# Altium PCB PCB_Oxi_VT0.1-991023.PcbDoc
Units mm, origin at the board's own origin, x right, y up, seen from the top; angles counter-clockwise.
Board outline 53 x 27 mm, 2 copper layers (Top Layer, Bottom Layer); 76 components, 66 nets, 324 pads, 0 vias.
Unrouted connection lines stored in the file: 150.
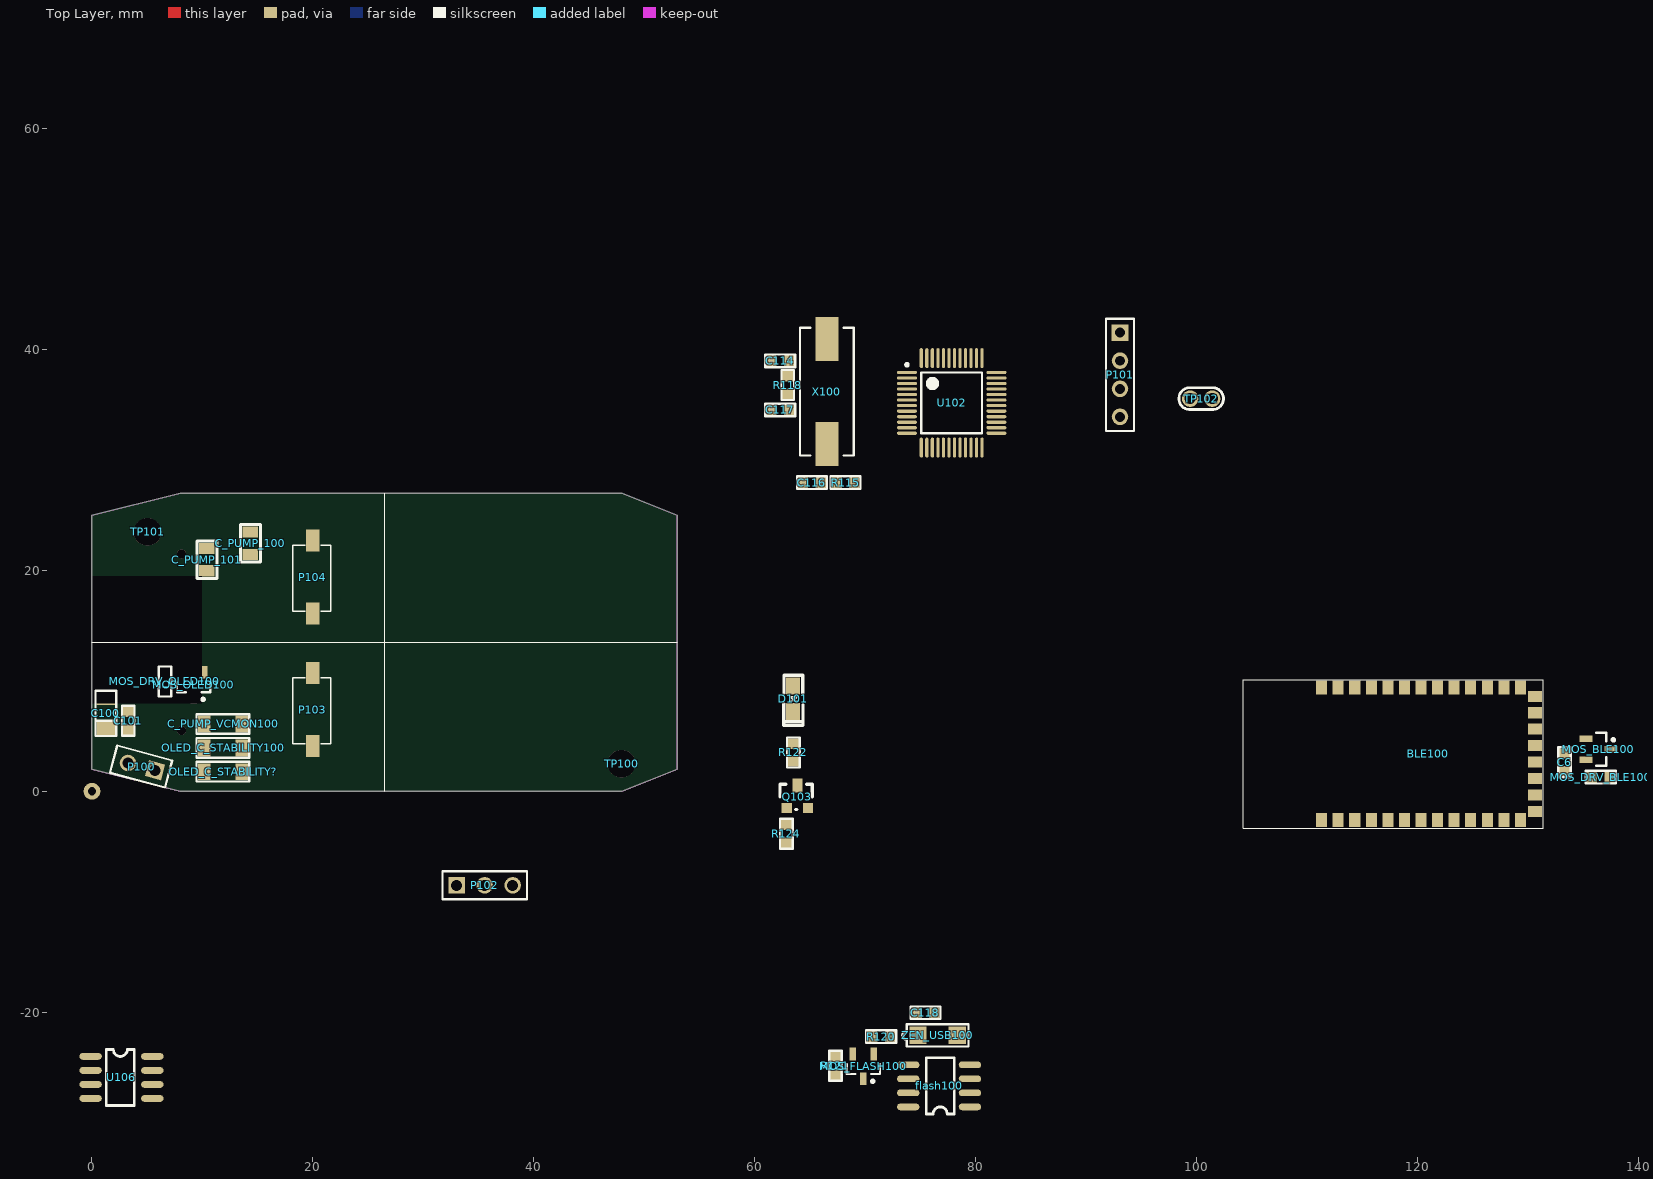
[diagram p0: Top Layer view]
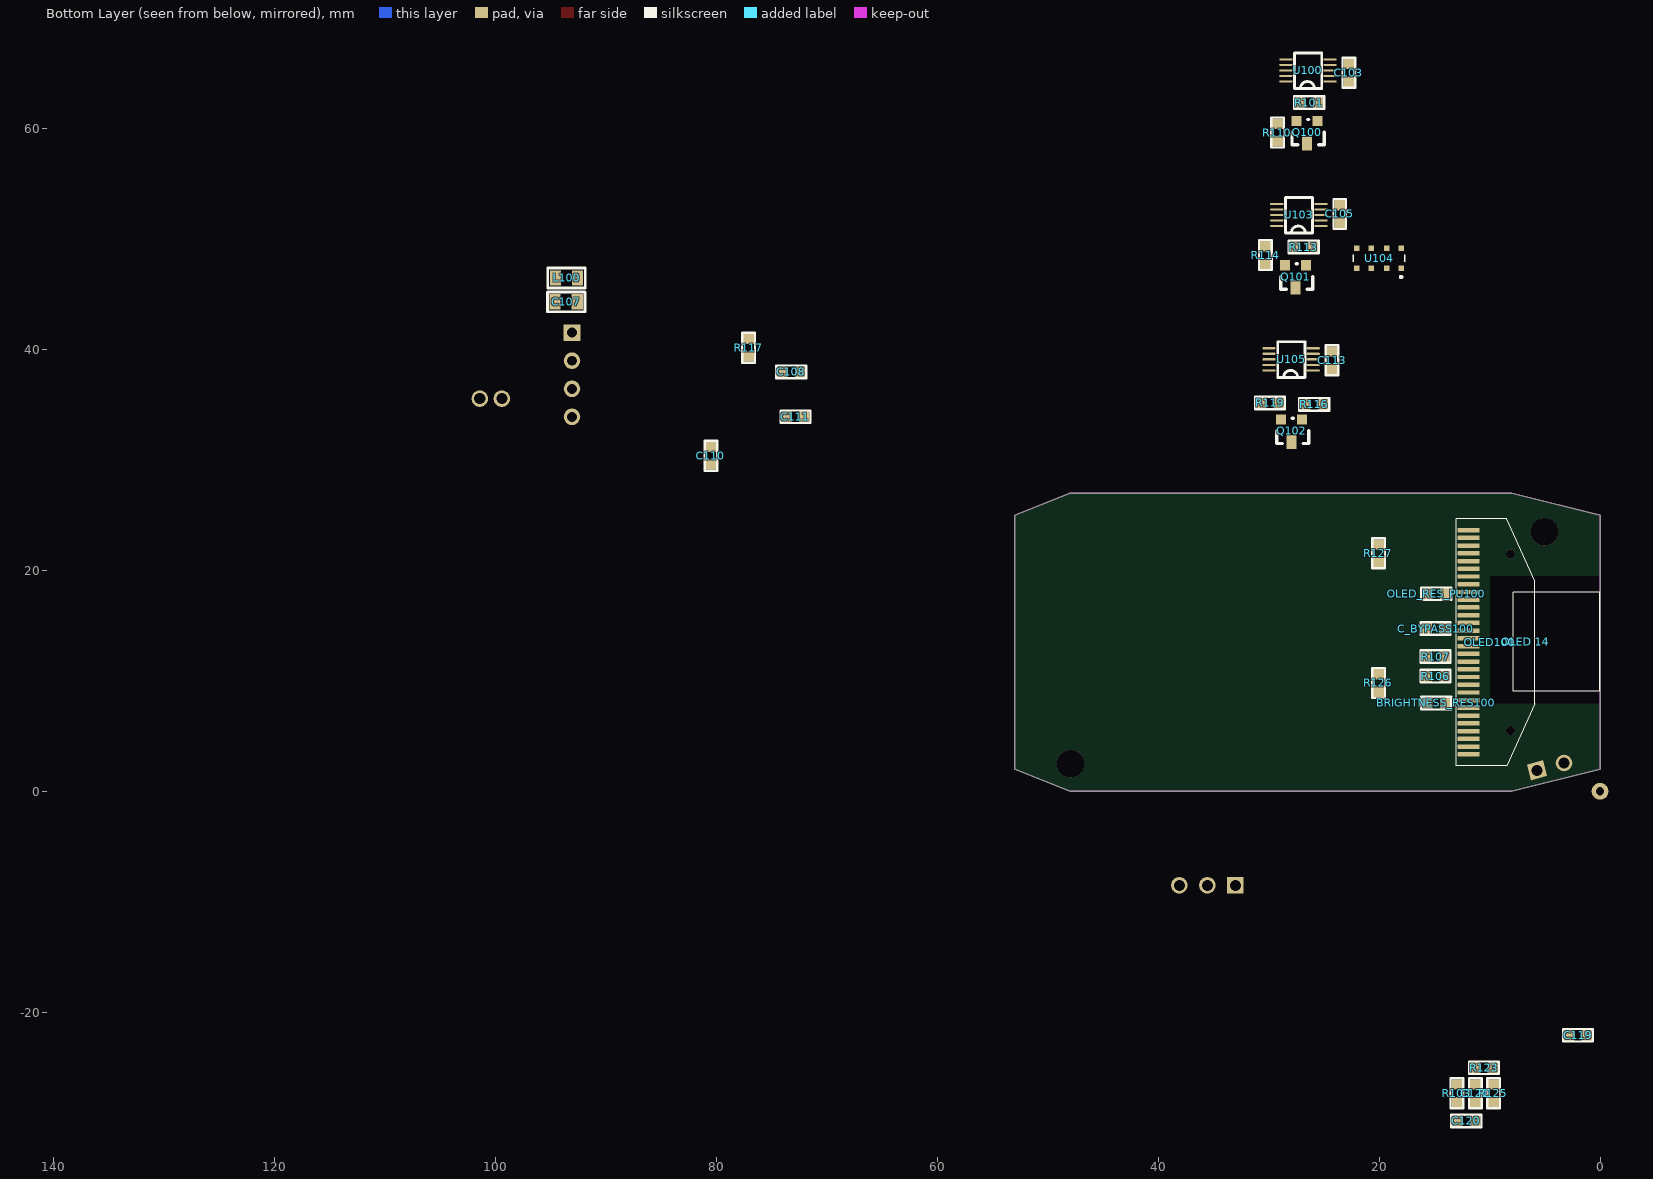
[diagram p1: Bottom Layer view, seen from below]

## Layer stack, top to bottom
Top Solder: solder mask 0.0102, Solder Resist, Dk 3.5
Top Layer: signal copper 0.0356
Dielectric 1: dielectric 0.32, FR-4, Dk 4.8
Bottom Layer: signal copper 0.0356
Bottom Solder: solder mask 0.0102, Solder Resist, Dk 3.5

## Board outline
0,2 8,0 48,0 53,2 53,25 48,27 8,27 0,25

## Design rules (kind name [scope] priority, off if disabled: settings)
AssemblyTestPointUsage [All] p1 off:
AssemblyTestpoint [All] p1 off: testpointundercomponent=TRUE minsize=1.016 maxsize=2.54 preferedsize=1.524 minholesize=0 maxholesize=1.016 preferedholesize=0.813 testpointgrid=0.025 usegrid=TRUE gridtolerance=0 allowsidetop=TRUE allowsidebottom=TRUE
Clearance [All] p1: gap=0.127 ignorepadtopadclearanceinfootprint=FALSE except(0: Arc-Hole Track-Hole SMDPad-Hole THPad-Hole Via-Hole Fill-Hole Poly-Hole Region-Hole Text-Hole)
ComponentClearance "OLED Clearance" [InComponent('OLED100') vs InComponent('OLED 14')] p1: gap=-2.54 collisioncheckmode=3 verticalgap=2540 showdistances=FALSE // OLED Rev diffrences
ComponentClearance [All] p2 off: gap=0.254 collisioncheckmode=3 verticalgap=0.254 showdistances=TRUE
FabricationTestPointUsage [All] p1 off: valid=0 allowmultiple=FALSE
FabricationTestpoint [All] p1 off: side=3 testpointundercomponent=TRUE minsize=1.016 maxsize=2.54 preferedsize=1.524 minholesize=0 maxholesize=1.016 preferedholesize=0.813 testpointgrid=0.025 allowsidetop=TRUE allowsidebottom=TRUE usegrid=TRUE gridtolerance=0
HoleSize [All] p1 off: absolutevalues=TRUE maxlimit=2.54 minlimit=0.025 maxpercent=80.000 minpercent=20.000
HoleToHoleClearance [All] p1 off: gap=0.254 allowstackedmicrovias=TRUE
LayerPairs [All] p1 off: enforce=TRUE
MinimumSolderMaskSliver [All] p1 off: minsoldermaskwidth=0.254
NetAntennae [All] p1 off: netantennaetolerance=0
PolygonConnect [All] p1: connectstyle=Relief reliefconductorwidth=0.254 reliefentries=4 polygonreliefangle="90 Angle" airgapwidth=0.254
RoutingVias [All] p1: holewidth=0.711 width=1.27 viastyle="Through Hole" minholewidth=0.711 minwidth=1.27 maxholewidth=0.711 maxwidth=1.27
SilkToSilkClearance [All] p1 off: silktosilkclearance=0.254
SilkToSolderMaskClearance [IsPad] p1 off: minsilkscreentomaskgap=0.254 clearancetoexposedcopper=TRUE
SolderMaskExpansion [All] p1: expansion=0.102
Width [All] p1: maxlimit=2.54 minlimit=0.254 preferedwidth=1.27
18 further rules are at their usual default settings.

## Components (designator, comment, footprint, x,y, rotation, side; value= is the part's Value field where it differs from the comment)
BLE100 "HM-16" HM-16 104.248,-3.094 r90 top
BRIGHTNESS_RES100 "Res3" 0603-2 14.021,8.001 r0 bottom value=390k
C6 "1uF" 0603-2 133.35,1.829 r90 top
C100 "47UF 16V(B)SMD" CAP-A 1.27,5.715 r90 top
C101 "100nF" 0603-2 3.302,5.588 r90 top
C103 "100nF" 0603-2 22.733,64.262 r90 bottom
C105 "100nF" 0603-2 23.558,51.478 r90 bottom
C107 "4.7uf" 0805-2 92.615,44.323 r0 bottom
C108 "100nF" 0603-2 74.041,37.973 r180 bottom
C110 "100nF" 0603-2 80.518,31.191 r270 bottom
C111 "10nF" 0603-2 73.66,33.909 r180 bottom
C113 "100nF" 0603-2 24.257,38.227 r90 bottom
C114 "20pF" 0603-2 63.119,38.989 r180 top
C116 "100nF" 0603-2 64.389,27.94 r0 top value=100pF
C117 "20pF" 0603-2 63.119,34.544 r180 top
C118 "100nF" 0603-2 74.676,-20.066 r0 top
C119 "100nF" 0603-2 2.794,-22.098 r180 bottom
C120 "1uF" 0603-2 11.303,-29.845 r0 bottom
C121 "10pF" 0603-2 11.303,-26.543 r270 bottom
C_BYPASS100 "Cap Semi" 0603-2 15.697,14.732 r180 bottom value=10uF
C_PUMP_100 "Cap Semi" 0805-2 14.351,21.463 r90 top value=1uF
C_PUMP_101 "Cap Semi" 0805-2 10.414,19.971 r90 top value=1uF
C_PUMP_VCMON100 "Cap Semi" 1206-2 10.16,6.096 r0 top value=10uF
D101 "LED (0805) B" 0805D 63.5,9.525 r270 top
flash100 "W25Q16BVSSIG" SO-8 79.604,-28.575 r180 top
L100 "EBLS2012-101K" 0805-2 94.583,46.482 r180 bottom
MOS_BLE100 "FDN360P" SOT23_N 136.416,3.81 r0 top
MOS_DRV_BLE100 "10K" 0603-2 135.814,1.27 r0 top value=1K
MOS_DRV_OLED100 "10K" 0603-2 6.604,10.744 r270 top value=1K
MOS_FLASH100 "FDN360P" SOT23_N 69.85,-24.91 r270 top
MOS_OLED100 "FDN360P" SOT23_N 9.21,9.67 r270 top
OLED100 "OLED" OLED0.96 10,13.5 r90 bottom locked
"OLED 14" "OLED(14pin)" OLED0.91_NO3D 6.731,17.578 r270 bottom locked
OLED_C_STABILITY100 "Cap Semi" 1206-2 10.16,3.937 r0 top value=10uF
OLED_C_STABILITY? "Cap Semi" 1206-2 10.16,1.778 r0 top value=10uF
OLED_RES_PU100 "Res3" 0603-2 14.021,17.907 r0 bottom value=4.7k
P100 "Header 2" A_HDR1X2 5.715,1.905 r165 top
P101 "Header 4" HDR1X4 93.091,41.529 r270 top
P102 "Header 3" A_HDR1X3_editted 33.02,-8.509 r0 top
P103 "Header 2" TACT-1 20,4 r90 top
P104 "Header 2" TACT-1 20,16 r90 top
Q100 "2n7002" a_SOT23 25.578,60.706 r0 bottom
Q101 "2n7002" a_SOT23 26.607,47.633 r0 bottom
Q102 "2n7002" a_SOT23 26.975,33.655 r0 bottom
Q103 "BC817" SOT23 62.814,-1.524 r0 top
R101 "1k" 0603-2 27.127,62.357 r180 bottom
R103 "0" 0603-2 12.954,-28.143 r90 bottom
R106 "10K" 0603-2 15.697,10.414 r180 bottom value=1K
R107 "10K" 0603-2 15.697,12.192 r180 bottom value=1K
R110 "22" 0603-2 29.21,60.452 r270 bottom
R113 "1k" 0603-2 27.623,49.284 r180 bottom
R114 "22" 0603-2 30.29,47.76 r90 bottom
R115 "10K" 0603-2 67.437,27.94 r0 top value=1K
R116 "1k" 0603-2 25.07,35.052 r0 bottom
R117 "10K" 0603-2 77.089,39.37 r90 bottom value=1K
R118 "1meg" 0603-2 62.992,37.592 r270 top value=1K
R119 "22" 0603-2 29.083,35.179 r0 bottom
R120 "22" 0603-2 70.663,-22.225 r0 top value=1K
R121 "10K" 0603-2 67.31,-24.054 r270 top value=1K
R122 "100" 0603-2 63.5,4.318 r270 top value=1K
R123 "2.7k" 0603-2 9.703,-25.019 r0 bottom
R124 "4.7K" 0603-2 62.865,-3.048 r270 top value=1K
R125 "100k" 0603-2 9.652,-26.543 r270 bottom
R126 "22" 0603-2 20.066,10.617 r270 bottom
R127 "22" 0603-2 20.066,22.352 r270 bottom
TP100 "HOLE" A_Ert#1 47.777,2.54 r0 top
TP101 "HOLE" A_Ert#2 3.708,24.384 r0 top
TP102 "HOLE" TP_Net 99.441,35.56 r0 top
U100 "AD5683RBRMZ" MSOP-10 24.448,64.278 r0 bottom
U102 "STM32F103C8T6" LQFP48_N 77.851,35.179 r0 top
U103 "AD5683RBRMZ" MSOP-10 25.273,51.189 r0 bottom
U104 "SFH_7050" XDCR_SFH_7050 20.011,48.271 r0 bottom
U105 "AD5683RBRMZ" MSOP-10 25.972,38.116 r0 bottom
U106 "AD8572ARZ" SO-8 -0.229,-24.003 r0 top
X100 "8MHz" xtal 66.548,36.195 r90 top
ZEN_USB100 "5V" DSMD 78.359,-22.098 r180 top

## Footprints (in the part's own frame and the unit in brackets; to place one, negate y for a bottom-side part, rotate by r counter-clockwise, add the part's x,y. Pads: shape width x height; smd on the part's side, far side on the other; paste and mask are expansions set on the pad)
0603-2 [mil]
  rect 37x40 smd: 1(0,0) 2(63,0)
  silkscreen extent -22,-22 85,23, body extent 1,-16 63,16, height 18
0805-2 [mm]
  rect 1x1.4 smd: 1(0,0) 2(2,0)
  silkscreen extent -0.7,-0.9 2.7,0.9, body extent 0,-0.58 2,0.67, height 0.5
0805D [mil]
  rect 60x50 smd: 1(0,0) 2(90,0)
  silkscreen extent -39,-35 140,36, body extent -15,-32 111,31, height 43
1206-2 [mil]
  rect 45x60 smd: 1(0,0) 2(135,0)
  silkscreen extent -27,-35 161,35, body extent 0,-31 122,30, height 22
A_Ert#1 [mm]
  round 2.5 hole 2.5: 1(0.176,-0.04)
A_Ert#2 [mm]
  round 2.5 hole 2.5: 1(1.322,-0.884)
A_HDR1X2 [mm] "Connector; Header; 4 Position"
  rect 1.5x1.5 hole 1: 1(0,0)
  round 1.5 hole 1: 2(2.54,0)
  silkscreen extent -1.27,-1.27 3.89,1.27, body extent -1.32,-1.3 3.76,1.24, height 18.51
A_HDR1X3_editted [mm] "Connector; Header; 4 Position"
  rect 1.5x1.5 hole 1: 1(0,0)
  round 1.5 hole 1: 2(2.54,0) 3(5.08,0)
  silkscreen extent -1.27,-1.27 6.38,1.27, body extent -1.19,-1.35 6.43,1.19, height 9.6
a_SOT23 [mil]
  rect 36x36 smd: 1(0,0) 2(75,0)
  rect 36x50 smd: 3(38,80)
  silkscreen extent -24,-5 91,85, body extent -23,-4 95,96, height 39
CAP-A [mm]
  rect 1.2x1.7 smd: 1(0,0) 2(2.7,0)
  silkscreen extent -0.71,-0.94 3.39,0.94, body extent -0.08,-0.69 3.12,0.91, height 1
DSMD [mil]
  rect 62x62 smd: 1(0,0) 2(140,0)
  silkscreen extent -40,-40 195,40, body extent 3,-27 149,36, height 63
HDR1X4 [mm] "Connector; Header; 4 Position"
  rect 1.5x1.5 hole 0.9: 1(0,0)
  round 1.5 hole 0.9: 2(2.54,0) 3(5.08,0) 4(7.62,0)
  silkscreen extent -1.27,-1.27 8.89,1.27
HM-16 [mm]
  rect 1.25x1 smd: 1(0.508,-7.1) 2(0.508,-8.6) 3(0.508,-10.1) 4(0.508,-11.6) 5(0.508,-13.1) 6(0.508,-14.6) 7(0.508,-16.1) 8(0.508,-17.6) 9(0.508,-19.1) 10(0.508,-20.6) 11(0.508,-22.1) 12(0.508,-23.6) 13(0.508,-25.1) 22(12.492,-25.1) 23(12.492,-23.6) 24(12.492,-22.11) 25(12.492,-20.6) 26(12.492,-19.1) 27(12.492,-17.6) 28(12.492,-16.1) 29(12.492,-14.6) 30(12.492,-13.1) 31(12.492,-11.6) 32(12.492,-10.1) 33(12.492,-8.6) 34(12.492,-7.1)
  rect 1x1.25 smd: 14(1.27,-26.416) 15(2.76,-26.416) 16(4.25,-26.416) 17(5.74,-26.416) 18(7.23,-26.416) 19(8.72,-26.416) 20(10.21,-26.416) 21(11.7,-26.416)
  silkscreen extent -0.25,-27.18 13.21,0
LQFP48_N [mm]
  oval 1.8x0.3 smd: 1(-4.05,2.75) 2(-4.05,2.25) 3(-4.05,1.75) 4(-4.05,1.25) 5(-4.05,0.75) 6(-4.05,0.25) 7(-4.05,-0.25) 8(-4.05,-0.75) 9(-4.05,-1.25) 10(-4.05,-1.75) 11(-4.05,-2.25) 12(-4.05,-2.75) 25(4.05,-2.75) 26(4.05,-2.25) 27(4.05,-1.75) 28(4.05,-1.25) 29(4.05,-0.75) 30(4.05,-0.25) 31(4.05,0.25) 32(4.05,0.75) 33(4.05,1.25) 34(4.05,1.75) 35(4.05,2.25) 36(4.05,2.75)
  oval 0.3x1.8 smd: 13(-2.75,-4.05) 14(-2.25,-4.05) 15(-1.75,-4.05) 16(-1.25,-4.05) 17(-0.75,-4.05) 18(-0.25,-4.05) 19(0.25,-4.05) 20(0.75,-4.05) 21(1.25,-4.05) 22(1.75,-4.05) 23(2.25,-4.05) 24(2.75,-4.05) 37(2.75,4.05) 38(2.25,4.05) 39(1.75,4.05) 40(1.25,4.05) 41(0.75,4.05) 42(0.25,4.05) 43(-0.25,4.05) 44(-0.75,4.05) 45(-1.25,4.05) 46(-1.75,4.05) 47(-2.25,4.05) 48(-2.75,4.05)
  silkscreen extent -4.17,-2.75 2.75,3.57
MSOP-10 [mm]
  oval 1.2x0.2 smd: 1(0,0) 2(0,-0.5) 3(0,-1) 4(0,-1.5) 5(0,-2) 6(4,-2) 7(4,-1.5) 8(4,-1) 9(4,-0.5) 10(4,0)
  silkscreen extent 0.75,-2.59 3.22,0.64
OLED0.91_NO3D [mm]
  rrect50% 0.32x2 smd: 1(0,0) 2(0.62,0) 3(1.24,0) 4(1.86,0) 5(2.48,0) 6(3.1,0) 7(3.72,0) 8(4.34,0) 9(4.96,0) 10(5.58,0) 11(6.2,0) 12(6.82,0) 13(7.44,0) 14(8.06,0)
  silkscreen extent -0.47,-1.14 8.53,6.69
OLED0.96 [mm]
  round 0.8 hole 0.8 unplated: 0(-8,-1.895) 0(8,-1.895)
  rrect30% 0.4x2 smd: 1(10.15,1.895) 2(9.45,1.895) 3(8.75,1.895) 4(8.05,1.895) 5(7.35,1.895) 6(6.65,1.895) 7(5.95,1.895) 8(5.25,1.895) 9(4.55,1.895) 10(3.85,1.895) 11(3.15,1.895) 12(2.45,1.895) 13(1.75,1.895) 14(1.05,1.895) 15(0.35,1.895) 16(-0.35,1.895) 17(-1.05,1.895) 18(-1.75,1.895) 19(-2.45,1.895) 20(-3.15,1.895) 21(-3.85,1.895) 22(-4.55,1.895) 23(-5.25,1.895) 24(-5.95,1.895) 25(-6.65,1.895) 26(-7.35,1.895) 27(-8.05,1.895) 28(-8.75,1.895) 29(-9.45,1.895) 30(-10.15,1.895)
  silkscreen extent -11.18,-4.11 11.18,3.04, body extent -12.84,-4.84 12.86,17.57, height 0.21
SO-8 [mil]
  oval 80x24 smd: 1(4,0) 2(4,-50) 3(4,-100) 4(4,-150) 5(224,-150) 6(224,-100) 7(224,-50) 8(224,0)
  silkscreen extent 60,-175 160,25, body extent -5,-173 239,24, height 69
SOT23 [mil]
  rect 36x36 smd: 1(4,0) 2(79,0)
  rect 36x50 smd: 3(42,80)
  silkscreen extent -20,-5 95,85
SOT23_N [mm] "SOT23, 3-Leads, Body 2.9x1.3mm, Pitch 0.95mm, Lead Span 2.3mm - Reverse Pinning, IPC Medium Density"
  rect 1.15x0.6 smd: 1(1.125,0) 2(-1.125,-0.95) 3(-1.125,0.95)
  silkscreen extent -0.2,-1.5 1.48,1.5, body extent -0.7,-1.5 0.7,1.5, height 1.1
TACT-1 [mm]
  rect 2x1.2 smd: 1(0.102,0) 2(6.702,0)
  silkscreen extent 0.3,-1.6 6.3,1.8, body extent -0.67,-1.77 7.33,1.83, height 2.4
TP_Net [mm]
  round 1.5 hole 1: 0(0,0) 0(2,0)
  silkscreen extent -1.02,-0.99 3.01,0.99
XDCR_SFH_7050 [mm]
  rect 0.5x0.5 smd paste-1 mask+0: 1(-2,0.9) 2(-0.69,0.9) 3(0.69,0.9) 4(2,0.9) 5(2,-0.9) 6(0.69,-0.9) 7(-0.69,-0.9) 8(-2,-0.9)
  silkscreen extent -2.35,-0.33 2.35,1.8, body extent -2.4,-1.16 2.4,1.16, height 0.99
xtal [mm] "Crystal, 2-Leads, Body 4.70x11.40mm, Pitch 8.80mm, IPC Medium Density"
  rect 4x2.1 smd: 1(-4.75,0) 2(4.75,0)
  silkscreen extent -5.77,-2.42 5.77,2.42, body extent -6.35,-2.35 6.35,2.35, height 4.2

## Part data
BRIGHTNESS_RES100 OLED_RES_PU100: "Resistor", LatestRevisionDate=29-May-2009, LatestRevisionNote="IPC-7351 Footprint Added.", PackageDescription="Chip Resistor", PackageReference=J1-0603, Published=8-Jun-2000, Publisher="Altium Limited"
C6 C101 C103 C105 C108 C110 C111 C113 C114 C116 C117 C118 C119 C120 C121: library part CAP, "Capacitor"
  C116: Published=8-Jun-2000, Publisher="Altium Limited", Revision="July-2002: Re-released for DXP Platform."
C100: library part CAPACITOR, "TAJD106M035RNJ"
C107: library part CAPACITOR, "Capacitor", TAJA106M010RNJ=10UF/10V
C_BYPASS100 C_PUMP_100 C_PUMP_101 C_PUMP_VCMON100 OLED_C_STABILITY100 OLED_C_STABILITY?: "Capacitor (Semiconductor SIM Model)", LatestRevisionDate=29-May-2009, LatestRevisionNote="IPC-7351 Footprint Added.", PackageDescription="Chip Capacitor", PackageReference=C1206, Published=8-Jun-2000, Publisher="Altium Limited"
D101: library part LED3, "Typical BLUE SiC LED", PackageDocument=16-Apr-2002, DatasheetDocument=16-Apr-2002, LatestRevisionDate=17-Dec-2003, LatestRevisionNote="PCB Footprint replaced.", PackageReference=3.5X2.8X1.9, Published=8-Jun-2000, Publisher="Altium Limited"
flash100: "FLASH - NOR Memory IC 16Mb _2M x 8_ SPI 104MHz 8-SOIC", Package="SOIC-8 Winbond", Availability=Unavailable, MF=Winbond, MP=W25Q16BVSSIG, Price=None, SnapEDA_Link=https://www.snapeda.com/parts/W25Q16BVSSIG/Winbond%20Electronics/view-part/512685/?ref=snap
L100: library part INDUCTOR, "Inductor 100UH (0805)", GLFR1608T100M-LR=10UH
MOS_BLE100 MOS_FLASH100 MOS_OLED100: library part MOSFET-P, "P-Channel MOSFET", LatestRevisionDate=17-Jul-2002, LatestRevisionNote="Re-released for DXP Platform.", PackageDescription="TO, Flat Index; 3 In-Line, Axial Leads; Body Dia. 4.6mm; Lead Dia. 0.5 mm (max)", PackageReference=E3, PackageVersion=1995/1996, Published=8-Jun-2000, Publisher="Altium Limited"
MOS_DRV_BLE100 MOS_DRV_OLED100 R115 R120 R121: library part res1, "Resistor", Published=8-Jun-2000, Publisher="Altium Limited", Revision="July-2002: Re-released for DXP Platform."
OLED100: library part OLED0.96
P100 P103 P104: "Header, 2-Pin", LatestRevisionDate=17-Jul-2002, LatestRevisionNote="Re-released for DXP Platform.", Publisher="Altium Limited"
P101: "Header, 4-Pin", LatestRevisionDate=17-Jul-2002, LatestRevisionNote="Re-released for DXP Platform.", Publisher="Altium Limited"
P102: "Header, 3-Pin", LatestRevisionDate=17-Jul-2002, LatestRevisionNote="Re-released for DXP Platform.", Publisher="Altium Limited"
Q100 Q101 Q102: library part MOSFET-N, "N-Channel MOSFET", LatestRevisionDate=17-Jul-2002, LatestRevisionNote="Re-released for DXP Platform.", PackageDescription="TO, Flat Index; 3 In-Line, Axial Leads; Body Dia. 4.6mm; Lead Dia. 0.5 mm (max)", PackageReference=E3, PackageVersion=1995/1996, Published=8-Jun-2000, Publisher="Altium Limited"
Q103: library part 2N3904, "NPN General Purpose Amplifier", ComponentLink1Description="Manufacturer Link", ComponentLink1URL=http://www.fairchildsemi.com/, ComponentLink2Description=Datasheet, ComponentLink2URL=http://www.fairchildsemi.com/ds/2N%2F2N3904.pdf, DatasheetVersion=1997, LatestRevisionDate=15-Jan-2003, LatestRevisionNote="PCB Footprint 'BCY-W3/D4.7' replaced", PackageDescription="TO, Flat Index; 3 In-Line, Axial Leads; Body Dia. 4.5mm; Leads 0.51 x 0.48 mm (max)", PackageReference=TO-92A, PackageVersion=Sep-1998, Published=8-Jun-2000, Publisher="Altium Limited"
R101 R103 R110 R113 R114 R116 R119 R123 R125 R126 R127: library part RES1
R106 R107 R117 R118 R122 R124: library part Res1, "Resistor", Published=8-Jun-2000, Publisher="Altium Limited", Revision="July-2002: Re-released for DXP Platform."
TP100 TP101 TP102: library part TP
U100 U103 U105: "Tiny 16-/14-/12-Bit SPI nanoDAC+, with  ±2 (16-Bit) LSB INL and 2 ppm/°C Reference"
U102: "STM32 ARM-based 32-bit MCU with 64 Kbytes Flash, 48-pin LQFP, Industrial Temperature"
U104: "Salida de voltaje del sensor de ox?­metro / frecuencia card?­aca", Package=None, Digi-Key_Part_Number=475-3346-1-ND, Digi-Key_Purchase_URL=https://www.digikey.com/product-detail/en/osram-opto-semiconductors-inc/SFH-7050/475-3346-1-ND/7645273?utm_source=snapeda&utm_medium=aggregator&utm_campaign=symbol, MF="OSRAM Opto", MP="SFH 7050", SnapEDA_Link=https://www.snapeda.com/parts/SFH%207050/OSRAM%20Opto%20Semiconductors%20Inc./view-part/227176/?ref=snap
U106: library part NJM3404
X100: library part CRYSTAL, "NTK-8.000000-HC49US"
ZEN_USB100: library part ZENER

## Free pads (board coordinates)
  round 1.524 hole 0.762: 2(0,0)
  round 0 hole 11.5 square: "OLED Hole"(4.191,13.716)

## Nets (pads, with @x,y where several pads share a name; then routed paths per layer and width w, separated by ;. In a path a pad name is that pad's centre, name@x,y a point inside that pad or via, vN(x,y) a via of type N, cw(c..) or ccw(c..) an arc to the next point about the centre after c; other vN are vias at no path point)
BOOT0: R117.1 U102.44
BUILTIN_LED: R124.2 U102.17
CPU_RXD: P102.2 U102.13
CPU_TXD: P102.1 U102.12
CS_FLASH: flash100.1 U102.25
DAC_Sync_1: U100.7 U102.45
DAC_Sync_2: U102.46 U103.7
DAC_Sync_3: U102.21 U105.7
GND: "OLED 14.7" BLE100.13 BLE100.14 BLE100.21 BLE100.22 BRIGHTNESS_RES100.2 C6.2 C100.2 C101.2 C103.2 C105.2 C107.2 C108.2 C110.2 C111.2 C113.2 C114.2 C116.1 C117.2 C118.2 C119.2 C_BYPASS100.1 C_PUMP_VCMON100.2 flash100.4 OLED100.1 OLED100.8 OLED100.10 OLED100.12 OLED100.13 OLED100.15 OLED100.16 OLED100.17 OLED100.21 OLED100.22 OLED100.23 OLED100.24 OLED100.25 OLED100.29 OLED100.30 OLED_C_STABILITY100.2 OLED_C_STABILITY?.2 P100.1 P101.1 P102.3 Q103.2 R110.2 R114.2 R117.2 R119.2 R123.1 R126.2 R127.2 TP102.0 U100.5 U102.8 U102.23 U102.35 U102.47 U103.5 U104.4 U105.5 U106.4 U106.5 ZEN_USB100.1
Key1: P103.1 U102.32
Key2: P104.1 U102.33
LEDA_1: C6.1 C100.1 C101.1 C103.1 C105.1 C113.1 C119.1 D101.1 L100.1 MOS_BLE100.2 MOS_DRV_BLE100.1 MOS_DRV_OLED100.1 MOS_FLASH100.2 MOS_OLED100.2 OLED_C_STABILITY?.1 P100.2 P101.4 R106.1 R107.1 R115.2 R121.1 U100.1 U100.2 U100.3 U100.9 U103.1 U103.2 U103.3 U103.9 U104.2 U104.3 U104.7 U105.1 U105.2 U105.3 U105.9 U106.3 U106.8
LEDK_1: Q100.3 U104.1
LEDK_2: Q101.3 U104.6
LEDK_3: Q102.3 U104.8
MISO: flash100.2 U102.27
MOSI: flash100.5 U102.28
NetBRIGHTNESS_RES100_1: "OLED 14.12" BRIGHTNESS_RES100.1 OLED100.26
NetC120_1: C120.1 C121.2 R125.2 U106.7
NetC_PUMP_100_1: "OLED 14.2" C_PUMP_100.1 OLED100.3
NetC_PUMP_100_2: "OLED 14.1" C_PUMP_100.2 OLED100.2
NetC_PUMP_101_1: "OLED 14.4" C_PUMP_101.1 OLED100.5
NetC_PUMP_101_2: "OLED 14.3" C_PUMP_101.2 OLED100.4
NetC_PUMP_VCMON100_1: "OLED 14.13" C_PUMP_VCMON100.1 OLED100.27
NetD101_2: D101.2 R122.1
NetMOS_FLASH100_3: MOS_FLASH100.3 R120.1
NetP103_2: P103.2 R126.1
NetP104_2: P104.2 R127.1
NetQ100_1: Q100.1 R101.2
NetQ100_2: Q100.2 R110.1
NetQ101_1: Q101.1 R113.2
NetQ101_2: Q101.2 R114.1
NetQ102_1: Q102.1 R116.2
NetQ102_2: Q102.2 R119.1
NetQ103_1: Q103.1 R124.1
NetQ103_3: Q103.3 R122.2
NetR101_1: R101.1 U100.10
NetR103_1: R103.1 U102.10
NetR113_1: R113.1 U103.10
NetR116_1: R116.1 U105.10
NRST: C116.2 R115.1 U102.7
OLED_RES: "OLED 14.9" C_BYPASS100.2 OLED100.14 OLED_RES_PU100.1 U102.19
OSC_In: C114.1 R118.1 U102.5 X100.2
OSC_Out: C117.1 R118.2 U102.6 X100.1
PLEDK: C121.1 R125.1 U104.5 U106.6
PWR_BLE: MOS_BLE100.1 MOS_DRV_BLE100.2 U102.20
PWR_OLED: MOS_DRV_OLED100.2 MOS_FLASH100.1 MOS_OLED100.1 R121.2 U102.18
PWR_PER: U102.43
RST_BLE: BLE100.11 U102.3
RX_BLE: BLE100.1 U102.31
SCK: flash100.6 U100.6 U102.26 U102.40 U103.6 U105.6
SCL: "OLED 14.10" OLED100.18 R107.2 U102.42
SDA: "OLED 14.11" OLED100.19 OLED100.20 R106.2 U102.41
SDI: U100.8 U102.39 U103.8 U105.8
SWCLK: P101.2 U102.37
SWDIO: P101.3 U102.34
TX_BLE: BLE100.2 U102.30
VCC_BLT: BLE100.12 MOS_BLE100.3
VCC_FLASH: C118.1 flash100.3 flash100.7 flash100.8 R120.2 ZEN_USB100.2
VCC_OLED: "OLED 14.5" "OLED 14.8" "OLED 14.14" MOS_OLED100.3 OLED100.6 OLED100.9 OLED100.28 OLED_C_STABILITY100.1 OLED_RES_PU100.2
VCPU: C107.1 C108.1 C110.1 L100.2 U102.1 U102.24 U102.36 U102.48
VCPU_A: C111.1 U102.9 U106.1 U106.2
Vout_LED1: U102.14
Vout_LED2: U102.15
Vout_LED3: U102.16
Vout_PLED: C120.2 R103.2 R123.2
pads on no net: "OLED 14.6" BLE100.3 BLE100.4 BLE100.5 BLE100.6 BLE100.7 BLE100.8 BLE100.9 BLE100.10 BLE100.15 BLE100.16 BLE100.17 BLE100.18 BLE100.19 BLE100.20 BLE100.23 BLE100.24 BLE100.25 BLE100.26 BLE100.27 BLE100.28 BLE100.29 BLE100.30 BLE100.31 BLE100.32 BLE100.33 BLE100.34 OLED100.0 OLED100.7 OLED100.11 TP100.1 TP101.1 U100.4 U102.2 U102.4 U102.11 U102.22 U102.29 U102.38 U103.4 U105.4

## Keep-outs
Keep-Out Layer:
  the board outline again, w0.1

## Silkscreen, mask and mechanical layers (free items; w line width, h text height)
Top Overlay:
  lines w0.1: 0,13.5 53,13.5 ; 26.5,0 26.5,27